# Altium PCB slave.PcbDoc
Units mil, origin at the board's own origin, x right, y up, seen from the top; angles counter-clockwise.
Board outline 6000 x 4000 mil, 2 copper layers (Top Layer, Bottom Layer); 28 components, 18 nets, 74 pads, 10 vias.
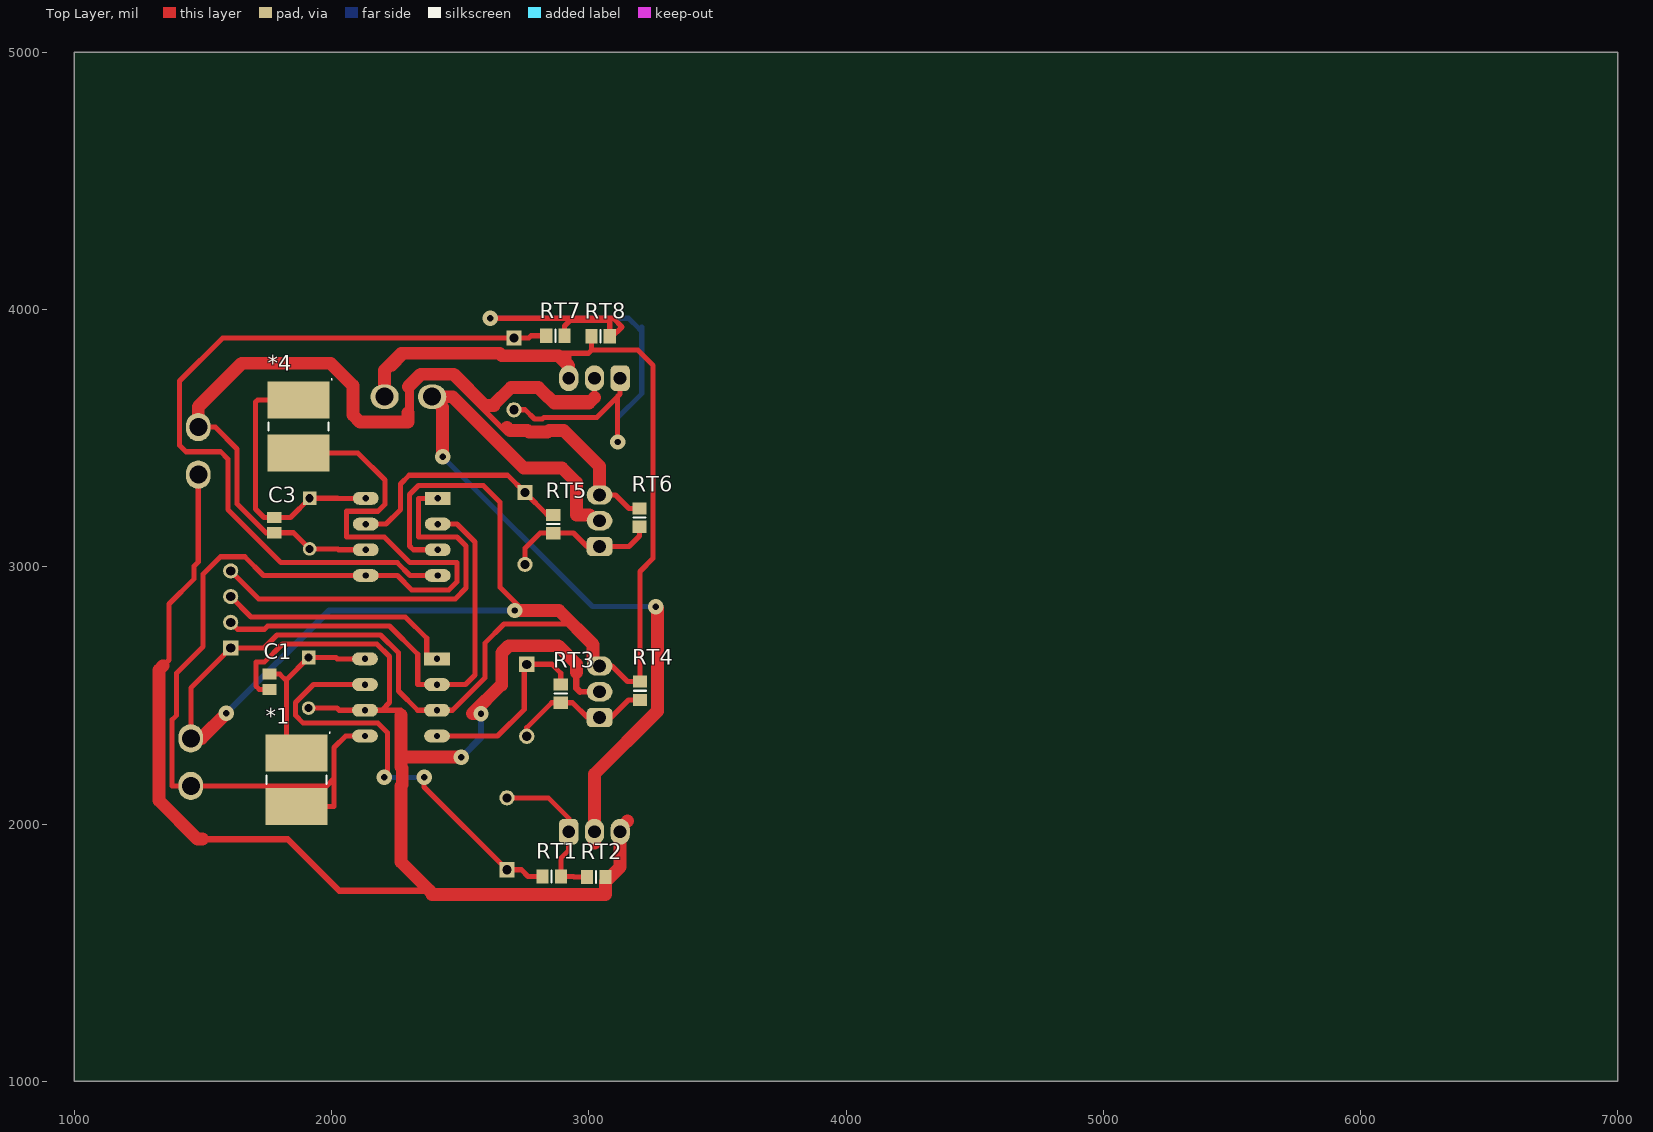
[diagram p0: Top Layer view]
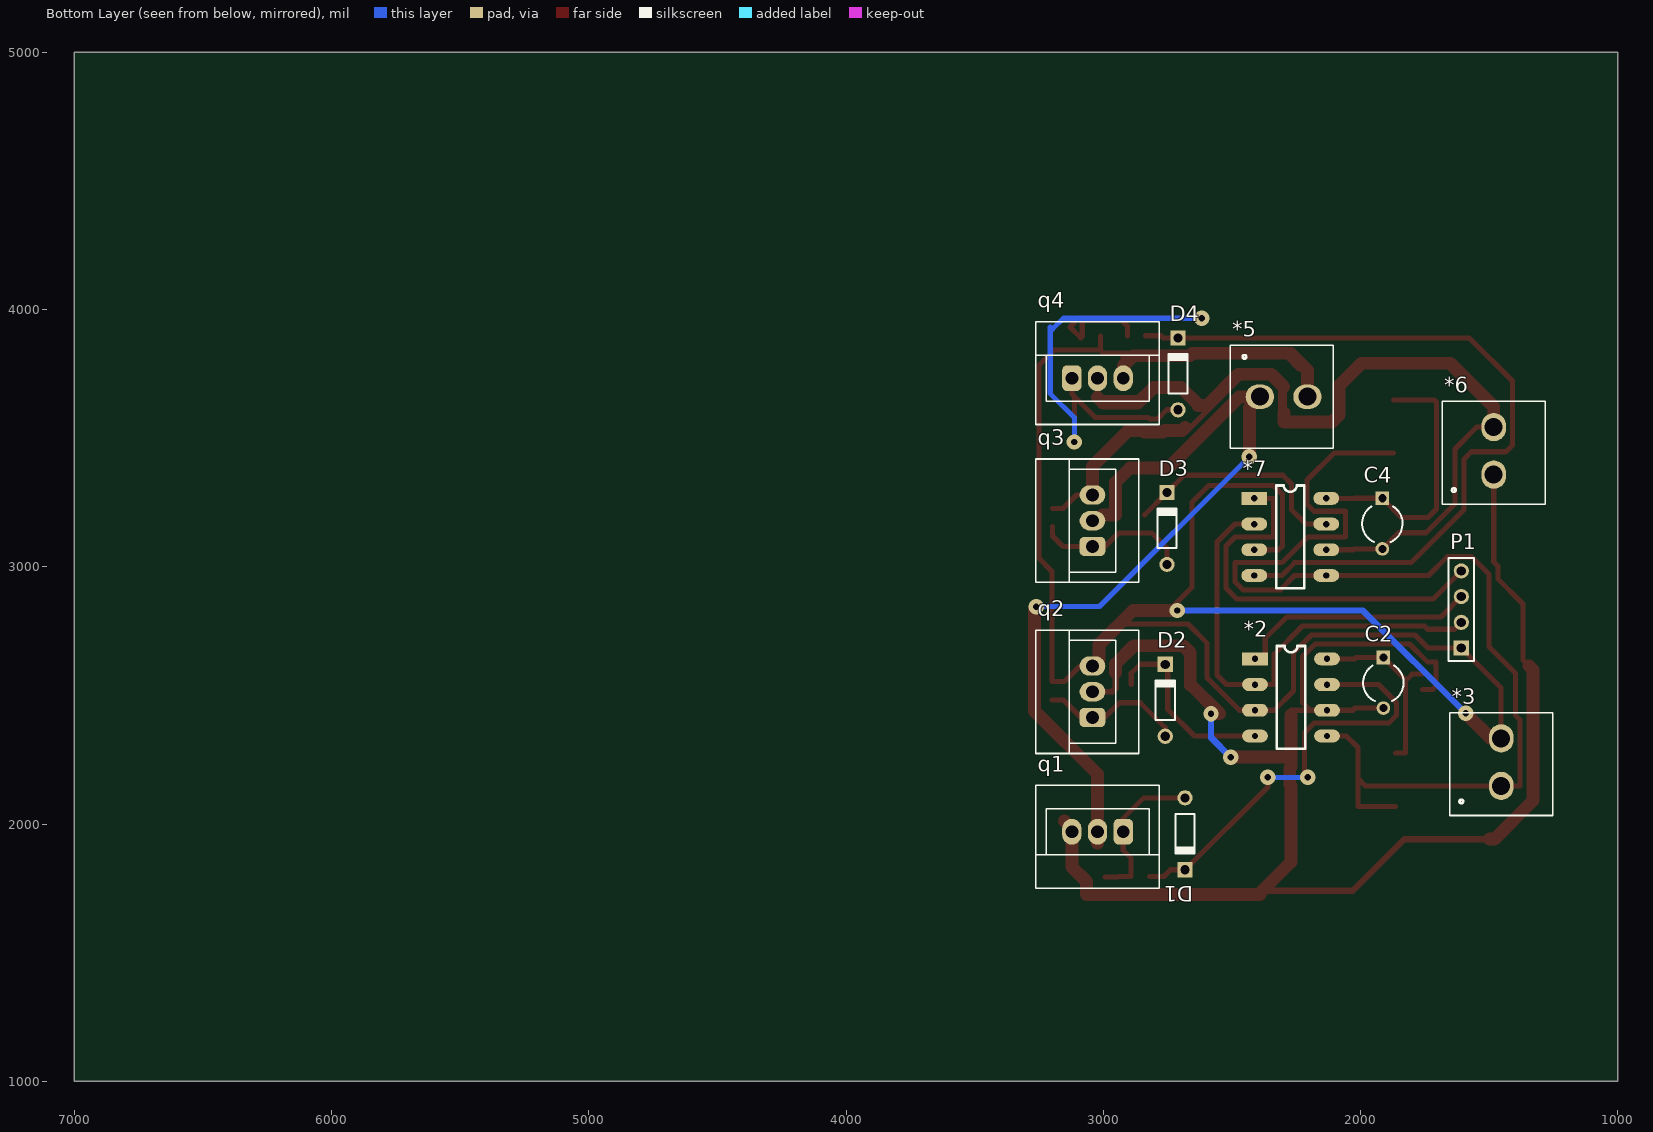
[diagram p1: Bottom Layer view, seen from below]

## Layer stack, top to bottom
Top Solder: solder mask 0.4, Solder Resist, Dk 3.5
Top Layer: signal copper 1.4
Dielectric 1: dielectric 12.6, FR-4, Dk 4.8
Bottom Layer: signal copper 1.4
Bottom Solder: solder mask 0.4, Solder Resist, Dk 3.5

## Board outline
1000,1000 7000,1000 7000,5000 1000,5000

## Design rules (kind name [scope] priority, off if disabled: settings)
Clearance "PolyGon Pour Clearance" [InPolyGon] p1: gap=30
Clearance [All] p2: gap=15
Height [All] p1 off: minheight=0 maxheight=1000 prefheight=500
PolygonConnect [All] p1: connectstyle=Relief reliefconductorwidth=10 reliefentries=4 polygonreliefangle="90 Angle" airgapwidth=10
RoutingVias [All] p1: holewidth=20 width=40 viastyle="Through Hole" minholewidth=20 minwidth=40 maxholewidth=25 maxwidth=45
SolderMaskExpansion [All] p1: expansion=4
UnpouredPolygon [All] p1: allowunpoured=FALSE
Width [All] p1: maxlimit=100 minlimit=20 preferedwidth=20 bottomlayer_maxwidth=25 minimp=50.000000 maximp=50.000000 favimp=50.000000
28 further rules are at their usual default settings.

## Components (designator, comment, footprint, x,y, rotation, side; value= is the part's Value field where it differs from the comment)
*1 "mbrs340t3" "diode mbrs34ot3" 1864,2172 r90 top
*2 "ir2184dip" ir2101 2410,2642 r180 bottom
*3 "domino2" Domino_2 1453,2158 r90 bottom
*4 "mbrs340t3" "diode mbrs34ot3" 1872,3545 r90 top
*5 "domino2" Domino_2 2381,3661 r180 bottom
*6 "domino2" Domino_2 1482,3368 r90 bottom
*7 "ir2184dip" ir2101 2413,3266 r180 bottom
C1 "Cap Pol3" C0805 1759,2553 r270 top
C2 "Cap2" CAPR5-4X5 1911,2549 r270 bottom
C3 "Cap Pol3" C0805 1777,3162 r270 top
C4 "Cap2" CAPR5-4X5 1915,3168 r270 bottom
D1 "Diode 1N4148" DO-35 2682,1962 r270 bottom
D2 "Diode 1N4148" DO-35 2759,2481 r90 bottom
D3 "Diode 1N4148" DO-35 2752,3149 r90 bottom
D4 "Diode 1N4148" DO-35 2709,3750 r90 bottom
P1 "Header 4" HDR1X4 1608,2684 r90 bottom
q1 "IRF540N" TO220 3022,1970 r0 bottom
q2 "IRF540N" TO220 3042,2514 r90 bottom
q3 "IRF540N" TO220 3042,3179 r90 bottom
q4 "IRF540N" TO220 3022,3733 r180 bottom
RT1 "Res Thermal" 6-0805_N 2856,1796 r180 top
RT2 "Res Thermal" 6-0805_N 3029,1794 r180 top
RT3 "Res Thermal" 6-0805_N 2891,2507 r90 top
RT4 "Res Thermal" 6-0805_N 3199,2518 r270 top
RT5 "Res Thermal" 6-0805_N 2862,3166 r90 top
RT6 "Res Thermal" 6-0805_N 3197,3191 r270 top
RT7 "Res Thermal" 6-0805_N 2870,3898 r180 top
RT8 "Res Thermal" 6-0805_N 3046,3896 r0 top

## Footprints (in the part's own frame and the unit in brackets; to place one, negate y for a bottom-side part, rotate by r counter-clockwise, add the part's x,y. Pads: shape width x height; smd on the part's side, far side on the other; paste and mask are expansions set on the pad)
6-0805_N [mm] "Chip Resistor, Body 2.0x1.2mm, IPC Medium Density"
  rect 1.2x1.4 smd: 1(-0.9,0) 2(0.9,0)
  silkscreen extent 0,-0.6 0,0.6, body extent -1.07,-0.7 1.07,0.7, height 0.7
C0805 [mm] "Chip Capacitor, Body 2.0x1.3mm, IPC High Density"
  rect 1.1x1.4 smd: 1(-0.75,0) 2(0.75,0)
  body extent -1.1,-0.72 1.1,0.72, height 1.4
CAPR5-4X5 [mm] "Capacitor; 2 Leads"
  rect 1.35x1.35 hole 0.8: 1(-2.5,0)
  round 1.35 hole 0.8: 2(2.5,0)
  silkscreen extent -1.69,-2 1.82,2
"diode mbrs34ot3" [mm] "Chip Diode, 2-Leads, Body 7,94x5,84mm, IPC Medium Density"
  rect 3.65x6.1 smd: 1(-2.625,0) 2(2.625,0)
  silkscreen extent -0.4,-3.31 4.71,2.95, body extent -4.07,-3.05 4.06,3.05, height 2
DO-35 [mm] "Diode, Axial; Body 3.8 x 1.9 mm (LxDia. max), Lead Dia. 0.53 mm (max)"
  round 1.5 hole 0.9: 1(-3.55,0)
  rect 1.5x1.5 hole 0.9: 2(3.55,0)
  silkscreen extent -1.95,-0.95 2.05,0.95
Domino_2 [mil]
  oval 110x95 hole 70: 1(-10,0) 2(175,0)
  silkscreen extent -125,-200 275,200
HDR1X4 [mm] "Connector; Header; 4 Position"
  rect 1.5x1.5 hole 0.9: 1(0,0)
  round 1.5 hole 0.9: 2(2.54,0) 3(5.08,0) 4(7.62,0)
  silkscreen extent -1.27,-1.27 8.89,1.27
ir2101 [mil]
  rect 100x50 hole 25: 1(0,0)
  oval 100x50 hole 25: 2(0,-100) 3(0,-200) 4(0,-300) 5(280,-300) 6(280,-200) 7(280,-100) 8(280,0)
  silkscreen extent 85,-350 195,50
TO220 [mil]
  rrect50% 75x100 hole 50: 1(-100,0)
  oval 75x100 hole 50: 2(0,0) 3(100,0)
  silkscreen extent -240,-180 240,220

## Part data
C1 C3: "Polarized Capacitor (Surface Mount)"
C2 C4: "Capacitor"
D1 D2 D3 D4: "High Conductance Fast Diode"
P1: "Header, 4-Pin"
RT1 RT2 RT3 RT4 RT5 RT6 RT7 RT8: "Thermistor"

## Via types
v1: diameter 60, hole 25, Top Layer to Bottom Layer, 10 vias

## Nets (pads, with @x,y where several pads share a name; then routed paths per layer and width w, separated by ;. In a path a pad name is that pad's centre, name@x,y a point inside that pad or via, vN(x,y) a via of type N, cw(c..) or ccw(c..) an arc to the next point about the centre after c; other vN are vias at no path point)
12V: *1.1 *2.5 *3.1 *4.1 *7.5 | length 4389.8
  Top Layer w20: *1.1 2010,2068.65 2010,2177 ; *4.1 2103.35,3441.65 2208,3337 2208,3243 2181,3216 2058,3216 2058,3116 2205,3116 2305,3016 2488,3016 2488,2942 2456,2910 2312,2910 2256,2966 *7.5 1736,2966 1663,3039 1568,3039 1501,2972 1501,2690 1398,2587 1398,2422.5 1380.5,2405 1380.5,2148 *3.1 1981,2148 2010,2177 ; *2.5 2055,2342 2010,2297 2010,2177
24V: *5.1 q1.2 q3.2 | length 3268.8
  Top Layer w50: v1(2432,3427) 2432,3620 *5.1 2470.29,3661 2747.29,3384 2896,3384 2952,3328 2952,3201.5 3002.68,3201.5 3025.18,3179 q3.2 ; q1.2@3022,1925 q1.2 3022,2194 3266.56,2438.56 3266.56,2838.44 v1(3260,2845)
  Bottom Layer w20: v1(2432,3427) 3014,2845 v1(3260,2845)
GND: *2.3 *3.2 *5.2 *7.3 P1.1 q2.3 q4.3 RT4.1 RT8.1 | length 9225.4
  Top Layer w20: *3.2 1453,2529 P1.1 1737.02,2684 1788.02,2735 2190.5,2735 2259.86,2665.64 2259.86,2517.14 2335,2442 *2.3 2470.62,2442 2596,2567.38 2596,2703 2671,2778 2917,2778 3017,2678 3023,2672 ; *5.2 *5.2@2206,3676 ; 2206,3744 2231,3769 2238.5,3769 2291.5,3822 2661.14,3822 2922,3822 2922,3781 q4.3 ; *7.3 2318,3066 2303,3081 2303,3281 2338,3316 2590,3316 2655,3251 2655,2920 2745,2830 ; 2653.14,3830 2998.57,3830 3010.57,3842 ; RT8.1 3010.57,3842 ; q2.3 3090,2614 3150.57,2553.43 RT4.1 3199,2982 3250,3033 3250,3783 3191,3842 3010.57,3842
  Top Layer w50: *3.2 1494,2333 v1(1591,2430) ; *5.2@2206,3676 2206,3744 2206,3764 2272,3830 2653.14,3830 2661.14,3822 2662.9,3820.24 2882.76,3820.24 q4.3@2922,3781 ; v1(2712,2830) 2745,2830 2884,2830 3017,2697 3017,2678 3017,2639 q2.3
  Bottom Layer w25: v1(1591,2430) 1991,2830 v1(2712,2830)
HO1: *2.7 D1.2 RT1.2 | length 1710.9
  Top Layer w20: *2.7 1929.42,2542 1859.42,2472 1859.42,2422.58 1890,2392 2181,2392 2218,2355 2218,2195 v1(2205,2182) ; v1(2360,2181) 2360,2144.24 D1.2 2738,1822.24 2764.24,1796 RT1.2
  Bottom Layer w20: v1(2205,2182) 2206,2181 v1(2360,2181)
HO2: *7.7 D3.2 RT5.2 | length 906.2
  Top Layer w20: *7.7 2212,3166 2268,3222 2268,3322 2302,3356 2684.76,3356 D3.2 RT5.2@2838.33,3202.43
IN1: *2.1 P1.3 | length 949.1
  Top Layer w20: P1.3 1687,2805 2287,2805 2370,2722 2370,2642 *2.1
IN2: *7.1 P1.4 | length 1566
  Top Layer w20: P1.4 1717,2875 2481,2875 2523,2917 2523,3081 2488,3116 2338,3116 2338,3266 *7.1
LO1: *2.4 D2.2 RT3.2 | length 751
  Top Layer w20: *2.4 2645.35,2342 2749,2445.65 2749,2610.76 D2.2 2856,2620.76 2891,2585.76 RT3.2
LO2: *7.4 D4.2 RT7.2 | length 3076.9
  Top Layer w20: *7.4 2305.5,2966 2255.5,3016 1804,3016 1598,3222 1598,3418 1569,3447 1434,3447 1409,3472 1409,3722 1576.76,3889.76 D4.2 2767,3889.76 2775.24,3898 RT7.2
Net*1_2: *1.2 *2.8 C1.1 C2.1 | length 744.9
  Top Layer w20: C1.1 1798.47,2582.53 1824.42,2556.58 ; *1.2 1824.42,2275.35 1824.42,2556.58 ; *2.8 2022.43,2642 2017,2647.43 C2.1 1824.42,2560.85 1824.42,2556.58
Net*4_2: *4.2 *7.8 C3.1 C4.1 | length 1059.1
  Top Layer w20: *4.2 1713.1,3648.35 1704.81,3640.06 1704.81,3224.72 1738,3191.53 C3.1 1840.1,3191.53 C4.1 2023,3266.43 2023.43,3266 *7.8
NetD1_1: D1.1 q1.1 RT1.1 RT2.2 | length 614.7
  Top Layer w20: D1.1 2842.24,2101.76 2922,2022 q1.1 2922,1897.57 2891.43,1867 RT1.1 2941,1796 2943,1794 RT2.2
Netd2_1: D2.1 q2.1 RT3.1 RT4.2 | length 565.8
  Top Layer w20: D2.1 2759,2374.57 2856,2471.57 RT3.1 2937,2471.57 2994.57,2414 q2.1 3086,2414 3154.57,2482.57 RT4.2
Netd3_1: D3.1 q3.1 RT5.1 RT6.2 | length 606.8
  Top Layer w20: D3.1 2752,3072 2811.57,3131.57 2894,3131.57 2941,3131.57 2993.57,3079 q3.1 3156,3079 3197,3120 RT6.2
Netd4_1: D4.1 q4.1 RT7.1 RT8.2 | length 2698.6
  Top Layer w20: v1(2617,3966) 3095.43,3966 3129.43,3932 3087.43,3890 RT8.2 3081.43,3960.57 3077.87,3957 2927,3957 2905.43,3935.43 RT7.1 ; D4.1 2752.76,3610.24 2789,3574 2819.42,3574 2826.23,3580.81 3030.81,3580.81 3122,3672 ; v1(3112,3485) 3112,3662 3122,3672 ; q4.1 3122,3672
  Bottom Layer w20: v1(2617,3966) 3155,3966 3198,3923 3206,3931 3206,3673 3112,3579 v1(3112,3485)
SD: *2.2 *7.2 P1.2 | length 1836.5
  Top Layer w20: P1.2 1635,2757 1739,2757 1752,2770 2225,2770 2335,2660 2335,2542 *2.2 2521,2542 2558,2579 2558,3096 2488,3166 *7.2
VS1: *2.6 *6.1 C1.2 C2.2 q1.3 q2.2 RT2.1 | length 6871.5
  Top Layer w20: 1345,2615 1368,2638 1368,2855 1466,2953 1466,3003 1482,3019 *6.1 ; C1.2 1718.84,2523.47 1706.44,2535.87 1706.44,2629.18 1738.43,2629.18 1809.25,2700 2176,2700 2224.86,2651.14 2224.86,2472 2194.86,2442 ; C2.2 2021,2450.57 2029.57,2442 *2.6 2194.86,2442 ; 2270,2442 2194.86,2442 ; 2966,2514 q2.2 ; RT2.1@3064.43,1775.43 RT2.1
  Top Layer w25: 1499,1941 1830,1941 2030,1741 2381,1741 ; 2952,2589.18 2952,2528 2966,2514
  Top Layer w50: 1345,2615 1329,2599 1329,2091 1479,1941 1499,1941 ; 2270,2424 2270,2259 ; v1(2505,2260) 2271,2260 2270,2259 ; v1(2581,2429) 2547.35,2429 2660.35,2542 ; 2661.67,2540.67 2661.67,2665.67 2689,2693 2881,2693 2952,2622 2952,2589.18 ; 3151,2012 3122,1983 q1.3 3122,1833 3064.43,1775.43 3064.43,1726.44 2390,1726.44 2390,1732 2381,1741 2270,1852 2270,2148.01 2275,2153.01 2275,2215.99 2270,2220.99 2270,2259
  Bottom Layer w25: v1(2505,2260) 2581,2336 v1(2581,2429)
VS2: *6.2 *7.6 C3.2 C4.2 q3.3 q4.2 RT6.1 | length 4606.8
  Top Layer w20: *6.2 1548,3543 1633.05,3457.95 1633.05,3245 1745.57,3132.47 C3.2 1852.1,3132.47 C4.2 2024,3069.57 2027.57,3066 *7.6 ; 2297,3599 2298.5,3600.5 ; 2311,3613 2311,3697 2348,3734 2468,3734 2671.9,3530.1 ; 2849.26,3668.74 2860,3658 3022,3658 q4.2 ; q3.3 3103.43,3279 3156,3226.43 RT6.1
  Top Layer w25: 2298.5,3600.5 2298.5,3699.74
  Top Layer w50: *6.2 1482,3622 1651,3791 1996,3791 2083,3704 2083,3590 2110,3563 2297,3563 2297,3599 ; 2298.5,3699.74 2347.26,3748.5 2474.71,3748.5 2596.21,3627 2631,3627 2631,3630.56 2697.44,3697 2804,3697 2840.76,3660.24 2842.76,3660.24 2866,3637 3001,3637 3022,3658 ; 2682.5,3540.71 2693.11,3530.11 2762.18,3530.11 2768.29,3524 2840.13,3524 2846.24,3530.11 2902.89,3530.11 3042,3391 q3.3